# EAGLE board LED (EAGLE 9.6.2)
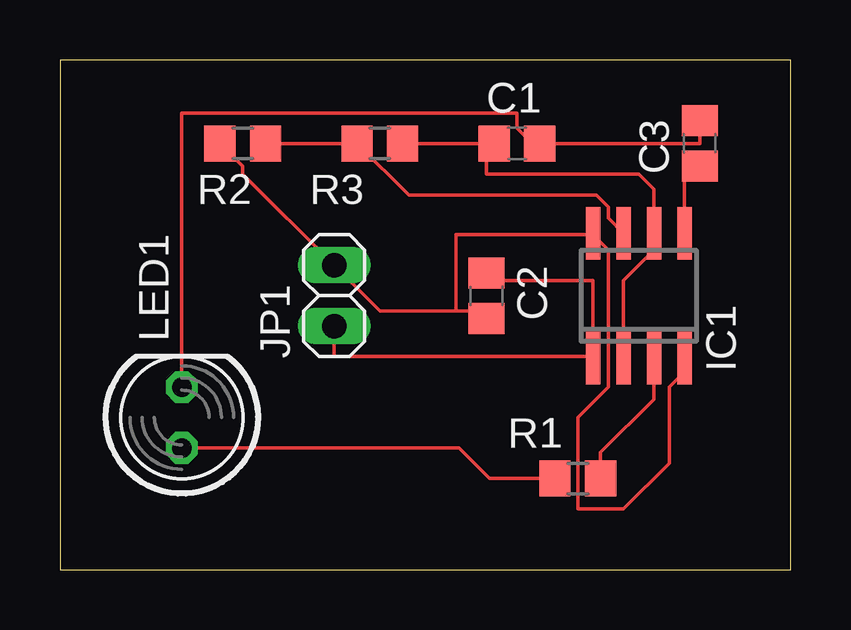
[diagram p0: board, top side]
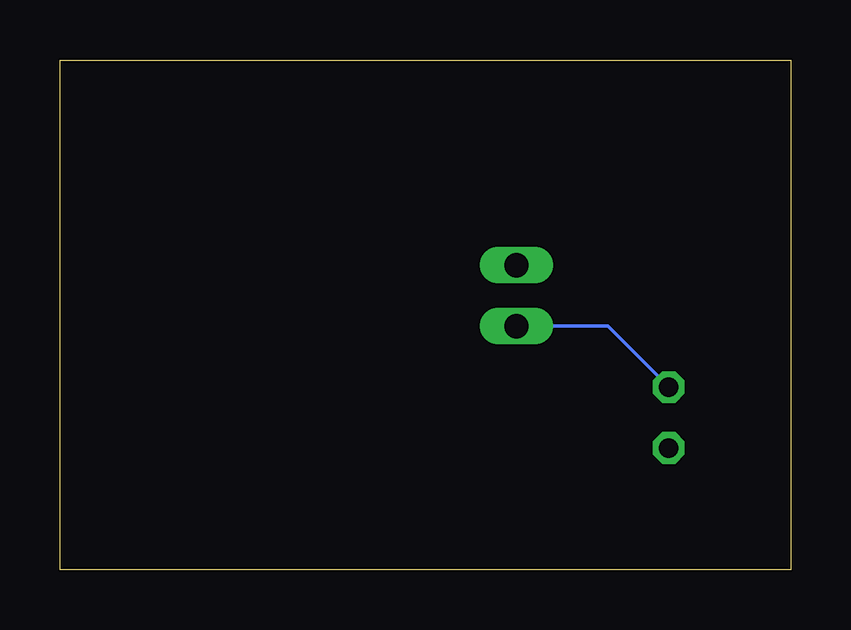
[diagram p1: board, bottom side, seen from below]

Size 30.46 x 21.26 mm. Coordinates in mm from the lower left corner, seen from the top.
Outline: 0,0 30.46,0 30.46,21.26 0,21.26 0,0
Copper layers (1*16): Top 0.035mm / dielectric 1.5mm / Bottom 0.035mm
Design rules "default": minimum track width 6mil, minimum drill 0.35mm, track to track 6mil, track to pad 6mil, pad to pad 6mil, via to via 6mil, smd to smd 6mil, copper to edge 40mil, drill to drill 6mil, minimum pad ring 10mil, minimum via ring 8mil, stop-mask expansion 4mil, vias tented up to drill 0mil, thermal gap 10mil

## Footprints (pad centres in the part's own frame; a part is rotated, then mirrored left to right if it is on the bottom)
C0805 = smd 1.3 x 1.5: 1 -0.95,0; 2 0.95,0
SO08 = smd 0.6 x 2.2: 1 -1.905,-2.6; 2 -0.635,-2.6; 3 0.635,-2.6; 4 1.905,-2.6; 5 1.905,2.6; 6 0.635,2.6; 7 -0.635,2.6; 8 -1.905,2.6
1X02 = drill 1.016 long: 1 -1.27,0; 2 1.27,0
LED5MM = drill 0.813 octagon: A -1.27,0; K 1.27,0
R0805 = smd 1.3 x 1.5: 1 -0.95,0; 2 0.95,0

## Placement (x,y rotation side)
C1  1u  [C0805]  19.05,17.78 0 top
C2  0.1u  [C0805]  17.78,11.43 270 top
C3  0.01u  [C0805]  26.67,17.78 90 top
IC1  LM555D  [SO08]  24.13,11.43 0 top
JP1  [1X02]  11.43,11.43 90 top
LED1  [LED5MM]  5.08,6.35 90 top
R1  120  [R0805]  21.59,3.81 180 top
R2  100k  [R0805]  7.62,17.78 0 top
R3  450k  [R0805]  13.34,17.78 0 top

## Library data of the parts
C1-C3 = rcl; SPICEPREFIX: C
IC1 = linear
JP1 = pinhead
LED1 = led
R1-R3 = rcl; SPICEPREFIX: R

## Nets
+5V: C2.2 IC1.4 IC1.8 JP1.2 R2.1
GND: C1.2 C2.1 C3.2 IC1.1 JP1.1 LED1.K
N$1: C3.1 IC1.5
N$3: IC1.7 R2.2 R3.1
N$4: C1.1 IC1.2 IC1.6 R3.2
N$5: LED1.A R1.2
N$6: IC1.3 R1.1

## Tracks (layer width: path | path; a pad name or v marks a point on that pad's centre or on a via)
+5V
  Top 0.152: 16.51,10.79 13.34,10.79 JP1.2 7.62,16.51 7.62,16.83 R2.1 | 16.51,10.79 17.78,10.79 C2.2 | 22.23,13.97 16.51,13.97 16.51,10.79 | 22.23,13.97 22.86,13.34 22.86,7.62 21.59,6.35 21.59,2.54 23.5,2.54 25.4,4.45 25.4,7.62 26.04,8.26 IC1.4 | 22.23,13.97 IC1.8
GND
  Top 0.152: 22.23,8.89 22.23,12.06 17.78,12.06 C2.1 | C3.2 26.67,17.78 C1.2 19.68,17.78 19.05,18.41 19.05,19.05 5.08,19.05 LED1.K | 22.23,8.89 11.43,8.89 JP1.1 | 22.23,8.89 IC1.1
  Bottom 0.152: LED1.K 7.62,10.16 JP1.1
N$1
  Top 0.152: IC1.5 26.04,16.2 C3.1
N$3
  Top 0.152: IC1.7 22.86,14.66 22.86,15.12 22.36,15.62 14.54,15.62 R3.1 R2.2
N$4
  Top 0.152: R3.2 C1.1 17.78,17.46 17.78,16.51 24.13,16.51 24.77,15.88 IC1.6 24.77,13.34 23.5,12.06 IC1.2
N$5
  Top 0.152: R1.2 17.91,3.81 16.64,5.08 LED1.A
N$6
  Top 0.152: R1.1 22.54,4.89 24.77,7.11 IC1.3